# EAGLE board CT_schematic (EAGLE 7.6.0)

Size 100 x 80 mm. Coordinates in mm from the lower left corner, seen from the top.
Outline: 0,0 100,0 100,80 0,80 0,0
Copper layers (1*16): Top 0.035mm / dielectric 1.5mm / Bottom 0.035mm
Design rules "default": minimum track width 10mil, minimum drill 24mil, track to track 8mil, track to pad 8mil, pad to pad 8mil, via to via 8mil, smd to smd 8mil, copper to edge 40mil, drill to drill 8mil, minimum pad ring 10mil, minimum via ring 8mil, stop-mask expansion 4mil, vias tented up to drill 0mil, thermal gap 10mil

## Footprints (pad centres in the part's own frame; a part is rotated, then mirrored left to right if it is on the bottom)
C0603 = smd 0.8 x 0.8: 1 -0.762,0; 2 0.762,0
C0402 = smd 0.5 x 0.5: 1 -0.508,0; 2 0.508,0
C1210 = smd 1.2 x 2.5: 1 -1.524,0; 2 1.524,0
EXV-9H = smd 3.505 x 1.676: 1 -2.857,0; 2 2.857,0
L0603 = smd 0.8 x 0.8: 1 -0.762,0; 2 0.762,0
PJ-037B_PACKAGE = drill 3.7 square: 1 12,0 | drill 3.2 square: 2 6,0
R0603 = smd 0.8 x 0.8: 1 -0.762,0; 2 0.762,0
TSSOP20-I = smd 0.4 x 1.35: 1 -2.925,-2.875; 2 -2.275,-2.875; 3 -1.625,-2.875; 4 -0.975,-2.875; 5 -0.325,-2.875; 6 0.325,-2.875; 7 0.975,-2.875; 8 1.625,-2.875; 9 2.275,-2.875; 10 2.925,-2.875; 11 2.925,2.875; 12 2.275,2.875; 13 1.625,2.875; 14 0.975,2.875; 15 0.325,2.875; 16 -0.325,2.875; 17 -0.975,2.875; 18 -1.625,2.875; 19 -2.275,2.875; 20 -2.925,2.875
ETRX3587 = smd 1 x 1.4: 1 0,0; 2 1.27,0; 3 2.54,0; 4 3.81,0; 5 5.08,0; 6 6.35,0; 7 7.62,0; 8 8.89,0; 9 10.16,0; 10 11.43,0; 11 12.7,0; 12 13.97,0; 13 15.24,0; 14 16.51,0; 15 17.78,0; 16 19.05,0; 17 20.32,0; 18 21.59,0; 19 22.86,0; 20 22.86,18.8; 21 21.59,18.8; 22 20.32,18.8; 23 19.05,18.8; 24 17.78,18.8; 25 16.51,18.8; 26 15.24,18.8; 27 13.97,18.8; 28 12.7,18.8; 29 11.43,18.8; 30 10.16,18.8; 31 8.89,18.8; 32 7.62,18.8; 33 6.35,18.8
TST-110-05-T-D-RA = drill 1 pad 1.7 square: 1 0,0 | drill 1 pad 1.7: 2 0,2.54; 3 2.54,0; 4 2.54,2.54; 5 5.08,0; 6 5.08,2.54; 7 7.62,0; 8 7.62,2.54; 9 10.16,0; 10 10.16,2.54; 11 12.7,0; 12 12.7,2.54; 13 15.24,0; 14 15.24,2.54; 15 17.78,0; 16 17.78,2.54; 17 20.32,0; 18 20.32,2.54; 19 22.86,0; 20 22.86,2.54
TDFN-8/6MM = smd 0.3 x 0.75: 1 0,0; 2 0.5,0; 3 1,0; 4 1.5,0; 5 1.5,3; 6 1,3; 7 0.5,3; 8 0,3
ABLS-25.000MHZ-B2F-T = smd 5.6 x 2.8: 1 -3.81,0; 2 5.69,0
WSON-8 = smd 0.3 x 0.6: 1 -0.75,0; 2 0.05,0; 3 0.85,0; 4 1.65,0; 5 1.65,3.8; 6 0.85,3.8; 7 0.05,3.8; 8 -0.75,3.8 | smd 3 x 2.6: PAD 0.45,1.9
SON-6 = smd 0.55 x 0.3: 1 -0.355,0.5 | smd 0.52 x 0.3: 2 -0.37,0; 3 -0.37,-0.5; 4 0.37,-0.5; 5 0.37,0; 6 0.37,0.5
SW_4-1437565-2 = smd 1.4 x 2.1: 1 -2.23,4.55; 2 -2.23,-4.55; 3 2.23,4.55; 4 2.23,-4.55
LGM67K-G1J2-24-Z = smd 0.8 x 1.4: A -2,0; C 0,0
NC7SZ125M5X = smd 1.3 x 0.7: 1 -1.3,0.95; 2 -1.3,0; 3 -1.3,-0.95; 4 1.3,-0.95; 5 1.3,0.95

## Placement (x,y rotation side)
C1  1e-07  [C0603]  -58.42,60.96 0 top  (outside the outline)
C2  1e-07  [C0603]  -62.23,60.96 0 top  (outside the outline)
C3  4.7e-06  [C0603]  -54.61,60.96 0 top  (outside the outline)
C4  1e-08  [C0603]  -66.04,60.96 0 top  (outside the outline)
C5  1e-06  [C0603]  -15.24,66.04 0 top  (outside the outline)
C6  1e-11  [C0402]  -53.34,66.04 0 top  (outside the outline)
C7  1e-11  [C0402]  -57.15,66.04 0 top  (outside the outline)
C8  1e-07  [C0402]  -60.96,66.04 0 top  (outside the outline)
C9  1e-07  [C0402]  -64.77,66.04 0 top  (outside the outline)
C10  1e-08  [C0402]  -68.58,66.04 0 top  (outside the outline)
C11  1e-08  [C0402]  -15.24,71.12 0 top  (outside the outline)
C12  1e-05  [C1210]  -16.51,55.88 0 top  (outside the outline)
C13  1e-05  [C1210]  -22.86,55.88 0 top  (outside the outline)
C14  1e-07  [C0402]  -19.05,71.12 0 top  (outside the outline)
C15  0.0001  [EXV-9H]  -17.78,48.26 0 top  (outside the outline)
C16  0.0001  [EXV-9H]  -29.21,48.26 0 top  (outside the outline)
C17  1e-08  [C0402]  -22.86,71.12 0 top  (outside the outline)
C18  1e-08  [C0402]  -26.67,71.12 0 top  (outside the outline)
C19  1e-08  [C0402]  -30.48,71.12 0 top  (outside the outline)
F1  240.0  [L0603]  -19.05,66.04 0 top  (outside the outline)
J1  PJ-037B  [PJ-037B_PACKAGE]  -64.77,7.62 0 top  (outside the outline)
R1  10000.0  [R0603]  -62.23,54.61 0 top  (outside the outline)
R2  1000.0  [R0603]  -22.86,66.04 0 top  (outside the outline)
R3  1270.0  [R0603]  -26.67,66.04 0 top  (outside the outline)
R4  4700.0  [R0603]  -30.48,66.04 0 top  (outside the outline)
R5  4700.0  [R0603]  -34.29,66.04 0 top  (outside the outline)
R6  2200.0  [R0603]  -38.1,66.04 0 top  (outside the outline)
R7  2200.0  [R0603]  -41.91,66.04 0 top  (outside the outline)
R8  10000.0  [R0603]  -67.31,54.61 0 top  (outside the outline)
R9  10000.0  [R0603]  -15.24,60.96 0 top  (outside the outline)
R10  10000.0  [R0603]  -20.32,60.96 0 top  (outside the outline)
R11  10000.0  [R0603]  -25.4,60.96 0 top  (outside the outline)
R12  10000.0  [R0603]  -30.48,60.96 0 top  (outside the outline)
R13  10000.0  [R0603]  -35.56,60.96 0 top  (outside the outline)
R14  100000.0  [R0603]  -46.99,54.61 0 top  (outside the outline)
R15  1500.0  [R0603]  -45.72,66.04 0 top  (outside the outline)
R16  1000.0  [R0603]  -49.53,66.04 0 top  (outside the outline)
R17  10000.0  [R0603]  -40.64,60.96 0 top  (outside the outline)
R18  10000.0  [R0603]  -45.72,60.96 0 top  (outside the outline)
R19  18000.0  [R0603]  -50.8,60.96 0 top  (outside the outline)
R20  470000.0  [R0603]  -52.07,54.61 0 top  (outside the outline)
R21  120000.0  [R0603]  -57.15,54.61 0 top  (outside the outline)
U1  STM32F030F4P6  [TSSOP20-I]  -43.18,29.21 0 top  (outside the outline)
U2  ETRX3587  [ETRX3587]  -48.26,1.27 0 top  (outside the outline)
U3  TST-110-05-T-D-RA  [TST-110-05-T-D-RA]  -67.31,36.83 0 top  (outside the outline)
U4  24AA128T-I/MNY  [TDFN-8/6MM]  -59.69,26.67 0 top  (outside the outline)
U5  ABLS-25.000MHZ-B2F-T  [ABLS-25.000MHZ-B2F-T]  -48.26,48.26 0 top  (outside the outline)
U6  LP3878SDX-ADJ/NOPB  [WSON-8]  -30.48,38.1 0 top  (outside the outline)
U7  TPS3895ADRYR  [SON-6]  -33.02,69.85 0 top  (outside the outline)
U8  4-1437565-2  [SW_4-1437565-2]  -27.94,29.21 0 top  (outside the outline)
U9  Q65110A2395  [LGM67K-G1J2-24-Z]  -59.69,48.26 0 top  (outside the outline)
U10  nc7sz125m5x  [NC7SZ125M5X]  -27.94,54.61 0 top  (outside the outline)
U11  nc7sz125m5x  [NC7SZ125M5X]  -34.29,54.61 0 top  (outside the outline)
U12  nc7sz125m5x  [NC7SZ125M5X]  -40.64,54.61 0 top  (outside the outline)

## Library data of the parts
C1-C19 F1 J1 R1-R21 U1-U12 = circuit_tree

## Nets
CLK_CRYSTAL_U1_2: C6.1 U1.2 U5.1
CLK_CRYSTAL_U1_3: C7.1 U1.3 U5.2
GND: C1.2 C2.2 C3.2 C4.2 C5.2 C6.2 C7.2 C8.2 C9.2 C10.2 C11.2 C12.2 C13.2 C14.2 C15.2 C16.2 C17.2 C18.2 C19.2 J1.2 R2.2 R8.2 R9.2 R16.2 R19.2 R21.2 U1.15 U2.1 U2.13 U2.19 U2.20 U2.31 U2.33 U3.4 U3.6 U3.8 U3.10 U3.12 U3.14 U3.16 U3.18 U3.20 U4.4 U4.7 U6.3 U6.PAD U7.2 U9.C U10.2 U10.3 U11.1 U11.3 U12.1 U12.3
NET_U1_1: R8.1 U1.1
NET_U1_4: R5.1 U1.4 U12.4
NET_U1_5: C4.1 C5.1 F1.1 U1.5
NET_U1_13: R3.1 U1.13 U9.A
NET_U1_14: R1.1 U1.14 U8.3 U8.4
NET_U1_17: R6.1 U1.17 U4.6
NET_U1_18: R7.1 U1.18 U4.5
NET_U2_7: R4.1 U2.7 U11.4
NET_U2_21: R9.1 U2.21
NET_U4_1: R11.1 U4.1
NET_U4_2: R12.1 U4.2
NET_U4_3: R13.1 U4.3
NET_U6_1: C11.1 U6.1
NET_U6_6: R15.2 R16.1 U6.6
NET_U6_8: R14.1 U6.8
NET_U7_1: R18.1 R19.1 U7.1
NET_U7_3: R20.2 R21.1 U7.3
NET_U7_4: R17.1 U7.4 U10.4 U11.2 U12.2
NET_U8_1: R2.1 U8.1 U8.2
PROC_SYS_SWCLK: U1.20 U3.9
PROC_SYS_SWDIO: U1.19 U3.7
PROC_USART1_CTS: U1.6 U2.8
PROC_USART1_RTS: U1.7 U2.6
PROC_USART1_RX: U1.9 U2.17
PROC_USART1_TX: U1.8 U2.18
RST_OUT_U3_SRESET_B: R10.1 U3.15 U10.1
VCC_S1_16V0: C12.1 C15.1 C16.1 J1.1 R14.2 U6.4
VCC_TIER1_2V5: C1.1 C2.1 C3.1 C8.1 C9.1 C10.1 C13.1 C14.1 C17.1 C18.1 C19.1 F1.2 R1.2 R3.2 R4.2 R5.2 R6.2 R7.2 R10.2 R11.2 R12.2 R13.2 R15.1 R17.2 R18.2 R20.1 U1.16 U2.32 U3.1 U4.8 U6.5 U7.6 U10.5 U11.5 U12.5

## Tracks (layer width: path | path; a pad name or v marks a point on that pad's centre or on a via)
CLK_CRYSTAL_U1_2  (2 unrouted)
CLK_CRYSTAL_U1_3  (2 unrouted)
GND  (53 unrouted)
NET_U1_1  (1 unrouted)
NET_U1_4  (2 unrouted)
NET_U1_5  (3 unrouted)
NET_U1_13  (2 unrouted)
NET_U1_14  (3 unrouted)
NET_U1_17  (2 unrouted)
NET_U1_18  (2 unrouted)
NET_U2_7  (2 unrouted)
NET_U2_21  (1 unrouted)
NET_U4_1  (1 unrouted)
NET_U4_2  (1 unrouted)
NET_U4_3  (1 unrouted)
NET_U6_1  (1 unrouted)
NET_U6_6  (2 unrouted)
NET_U6_8  (1 unrouted)
NET_U7_1  (2 unrouted)
NET_U7_3  (2 unrouted)
NET_U7_4  (4 unrouted)
NET_U8_1  (2 unrouted)
PROC_SYS_SWCLK  (1 unrouted)
PROC_SYS_SWDIO  (1 unrouted)
PROC_USART1_CTS  (1 unrouted)
PROC_USART1_RTS  (1 unrouted)
PROC_USART1_RX  (1 unrouted)
PROC_USART1_TX  (1 unrouted)
RST_OUT_U3_SRESET_B  (2 unrouted)
VCC_S1_16V0  (5 unrouted)
VCC_TIER1_2V5  (34 unrouted)